# Altium PCB Balun_And_Demodulation.PcbDoc
Units mm, origin at the board's own origin, x right, y up, seen from the top; angles counter-clockwise.
Board outline 132 x 100 mm, 4 copper layers (Top Layer, GND, VCC, Bottom Layer), stack 1.593 mm thick; 59 components, 40 nets, 289 pads, 241 vias.
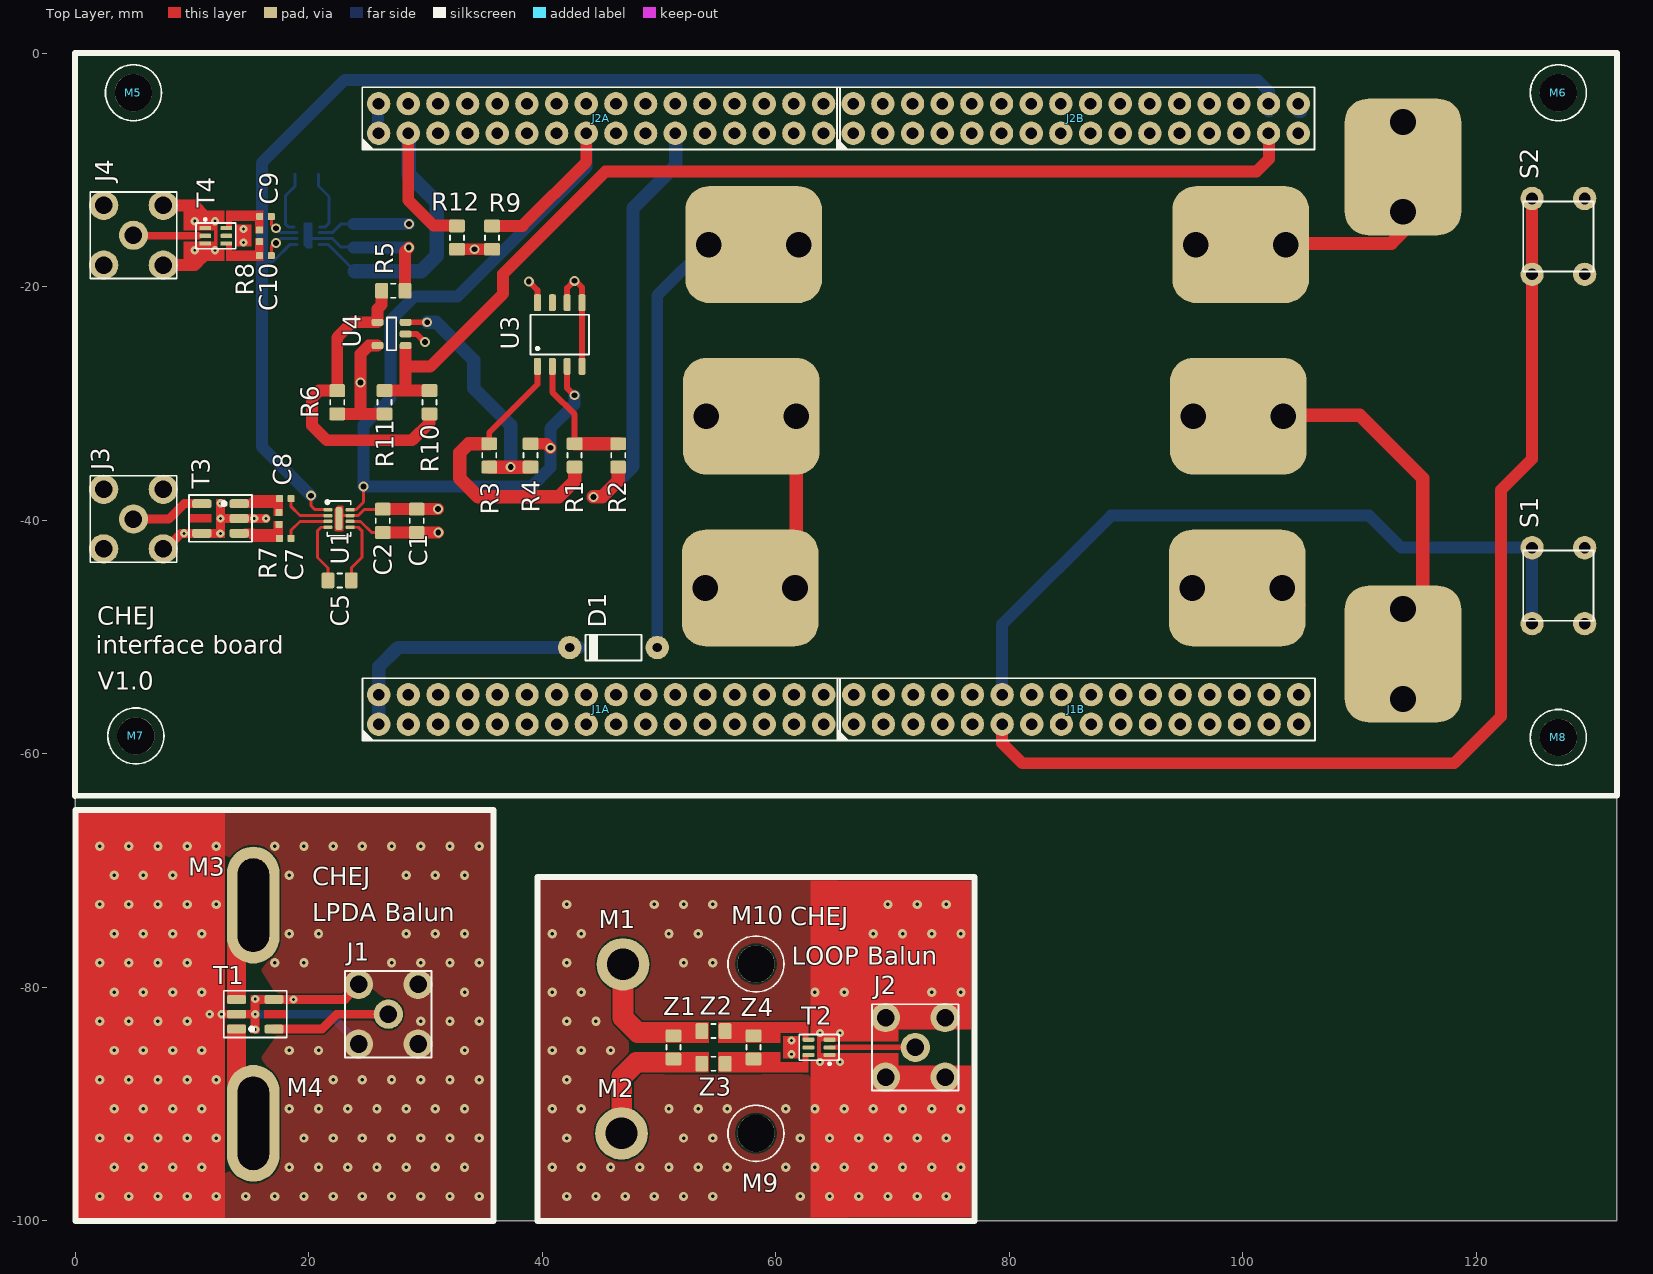
[diagram p0: Top Layer view]
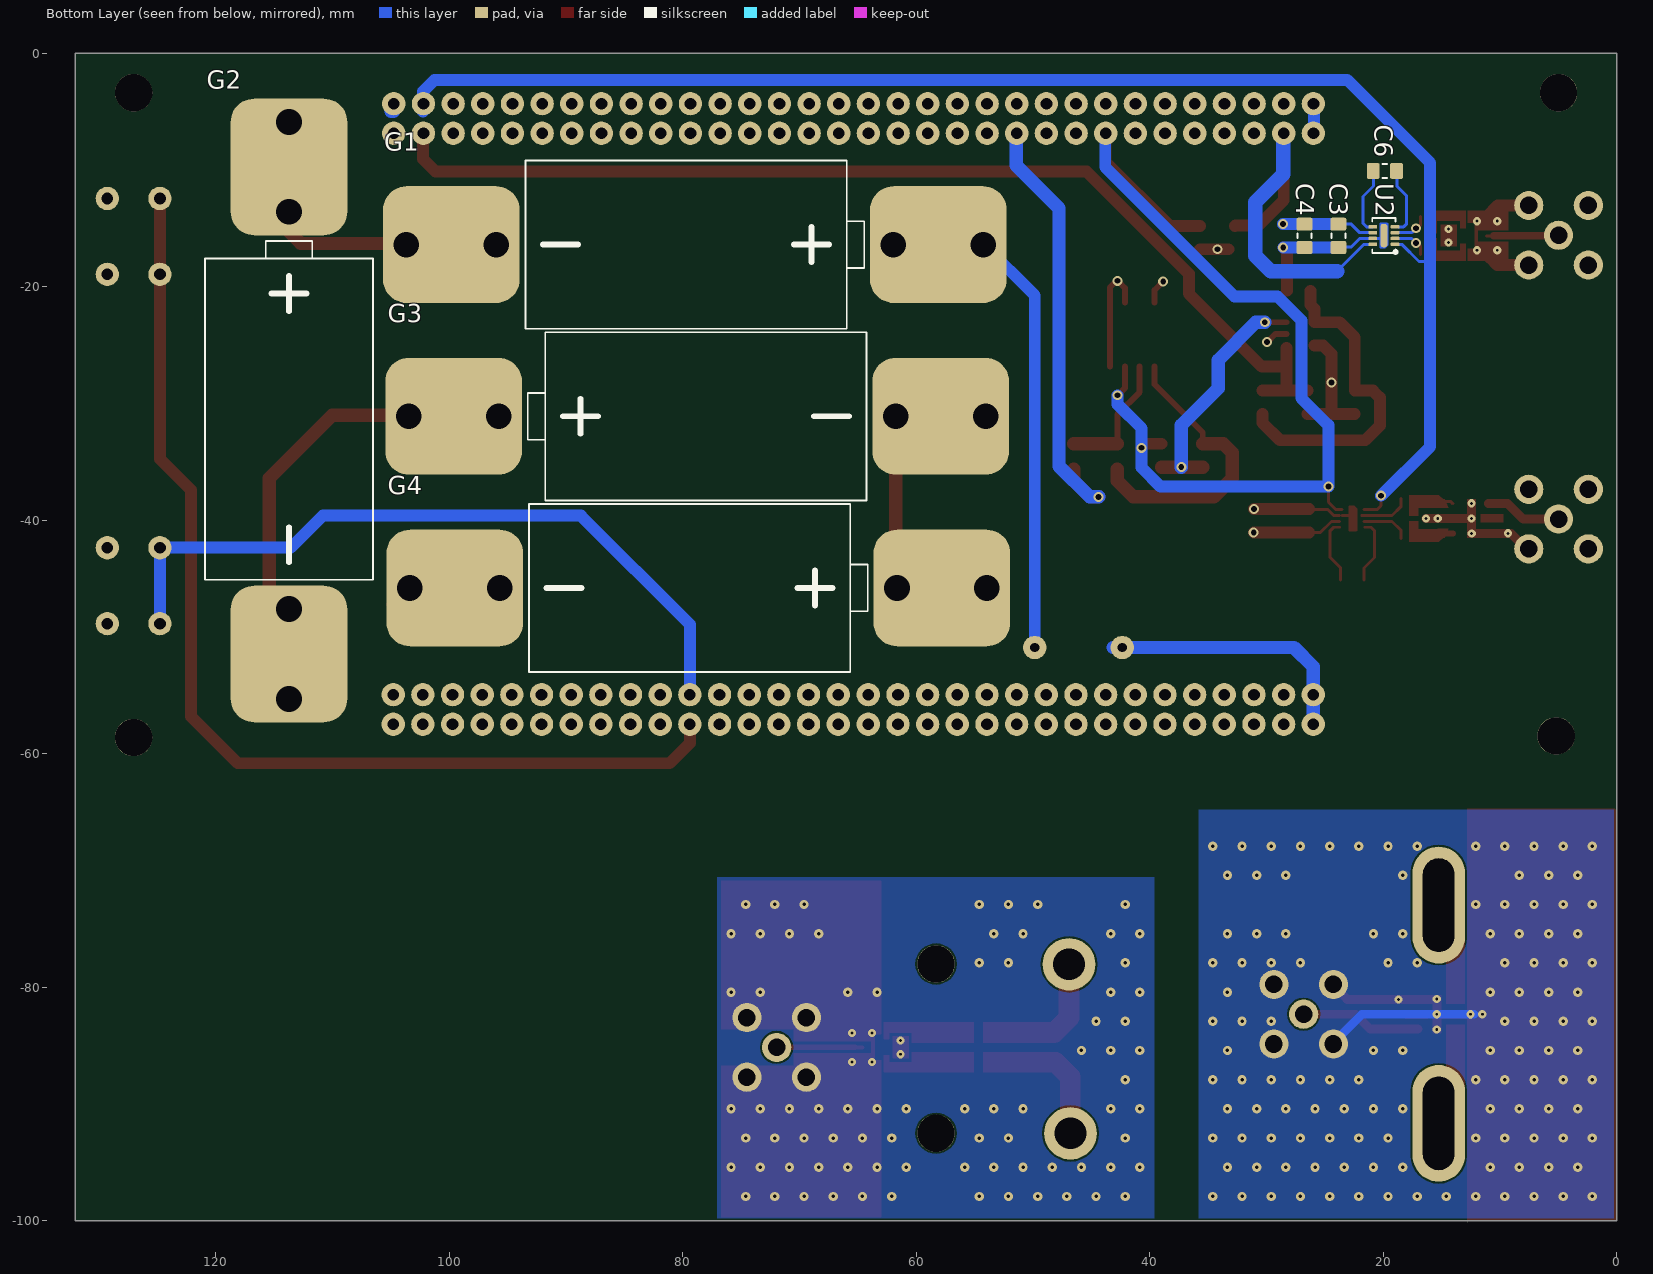
[diagram p1: Bottom Layer view, seen from below]
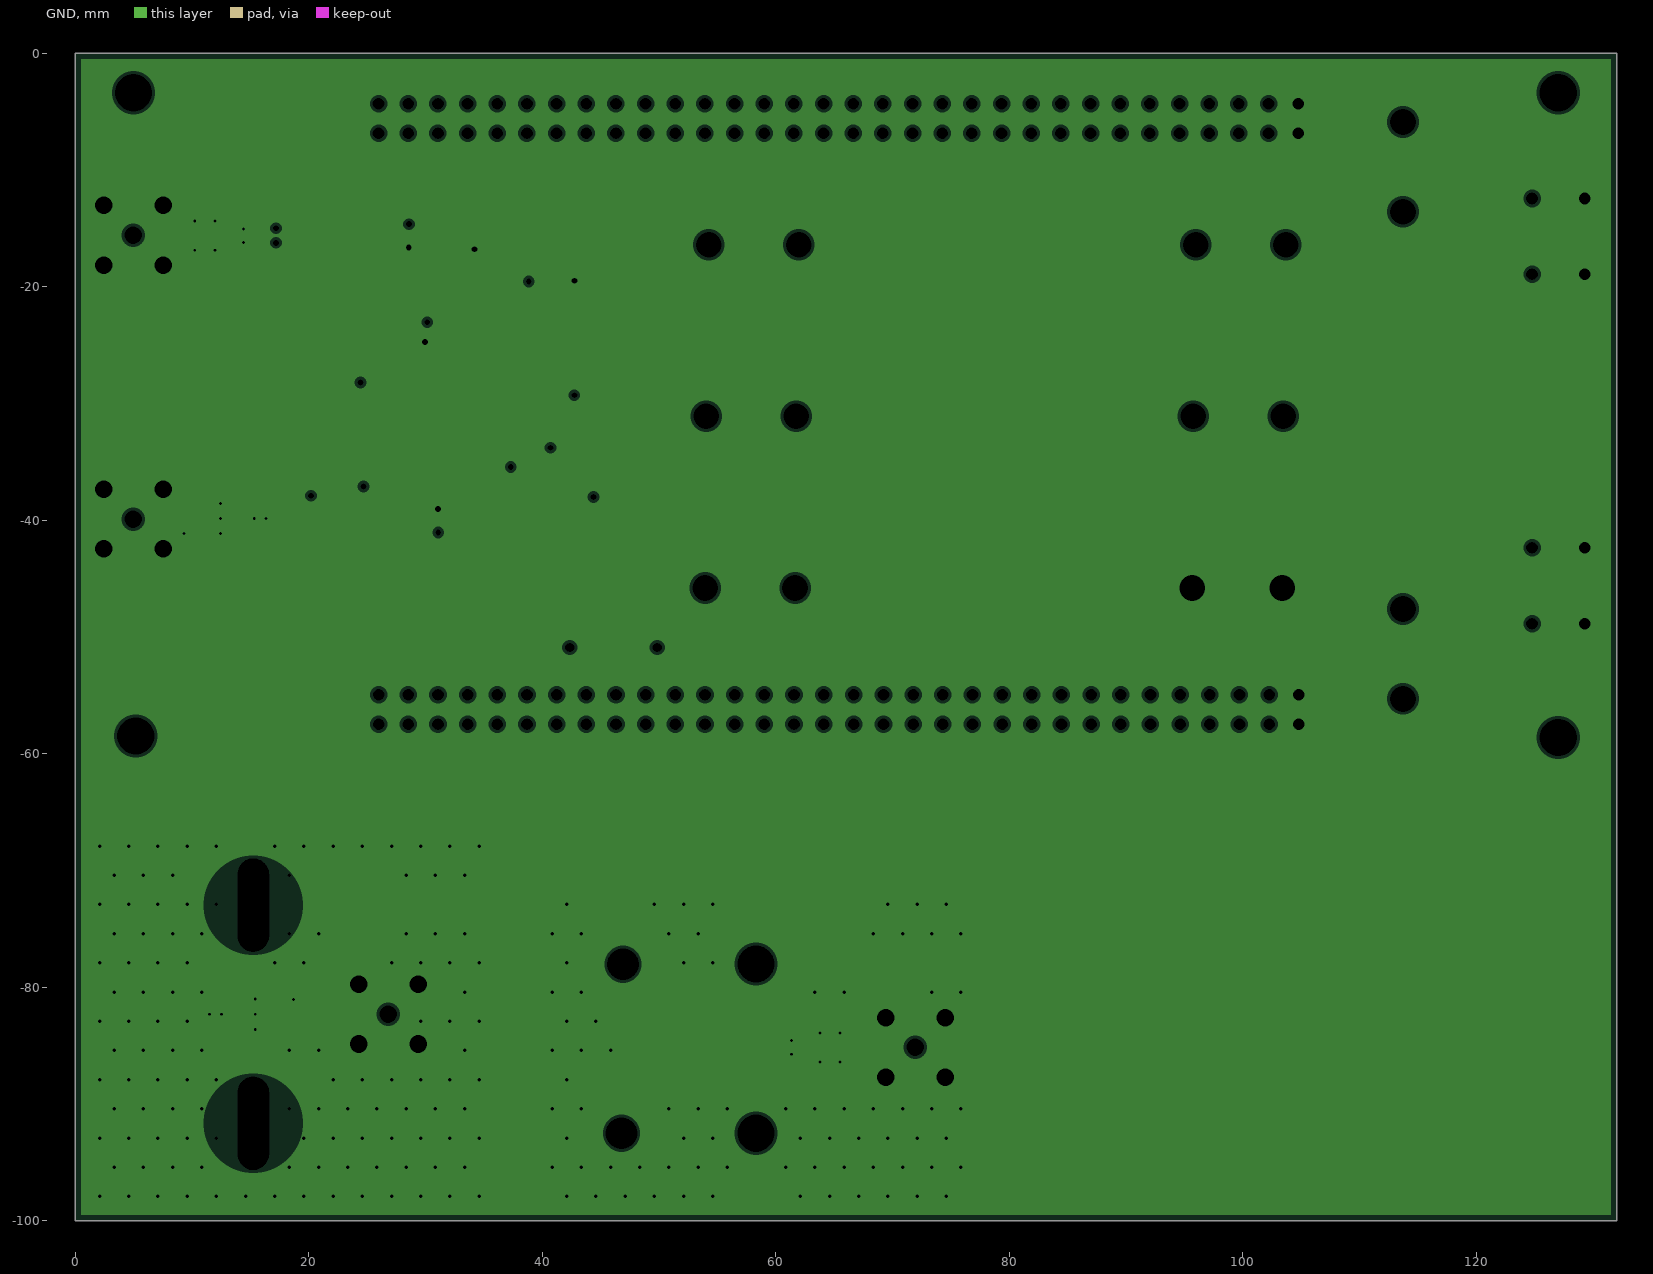
[diagram p2: GND, clearances drawn from the general rule]
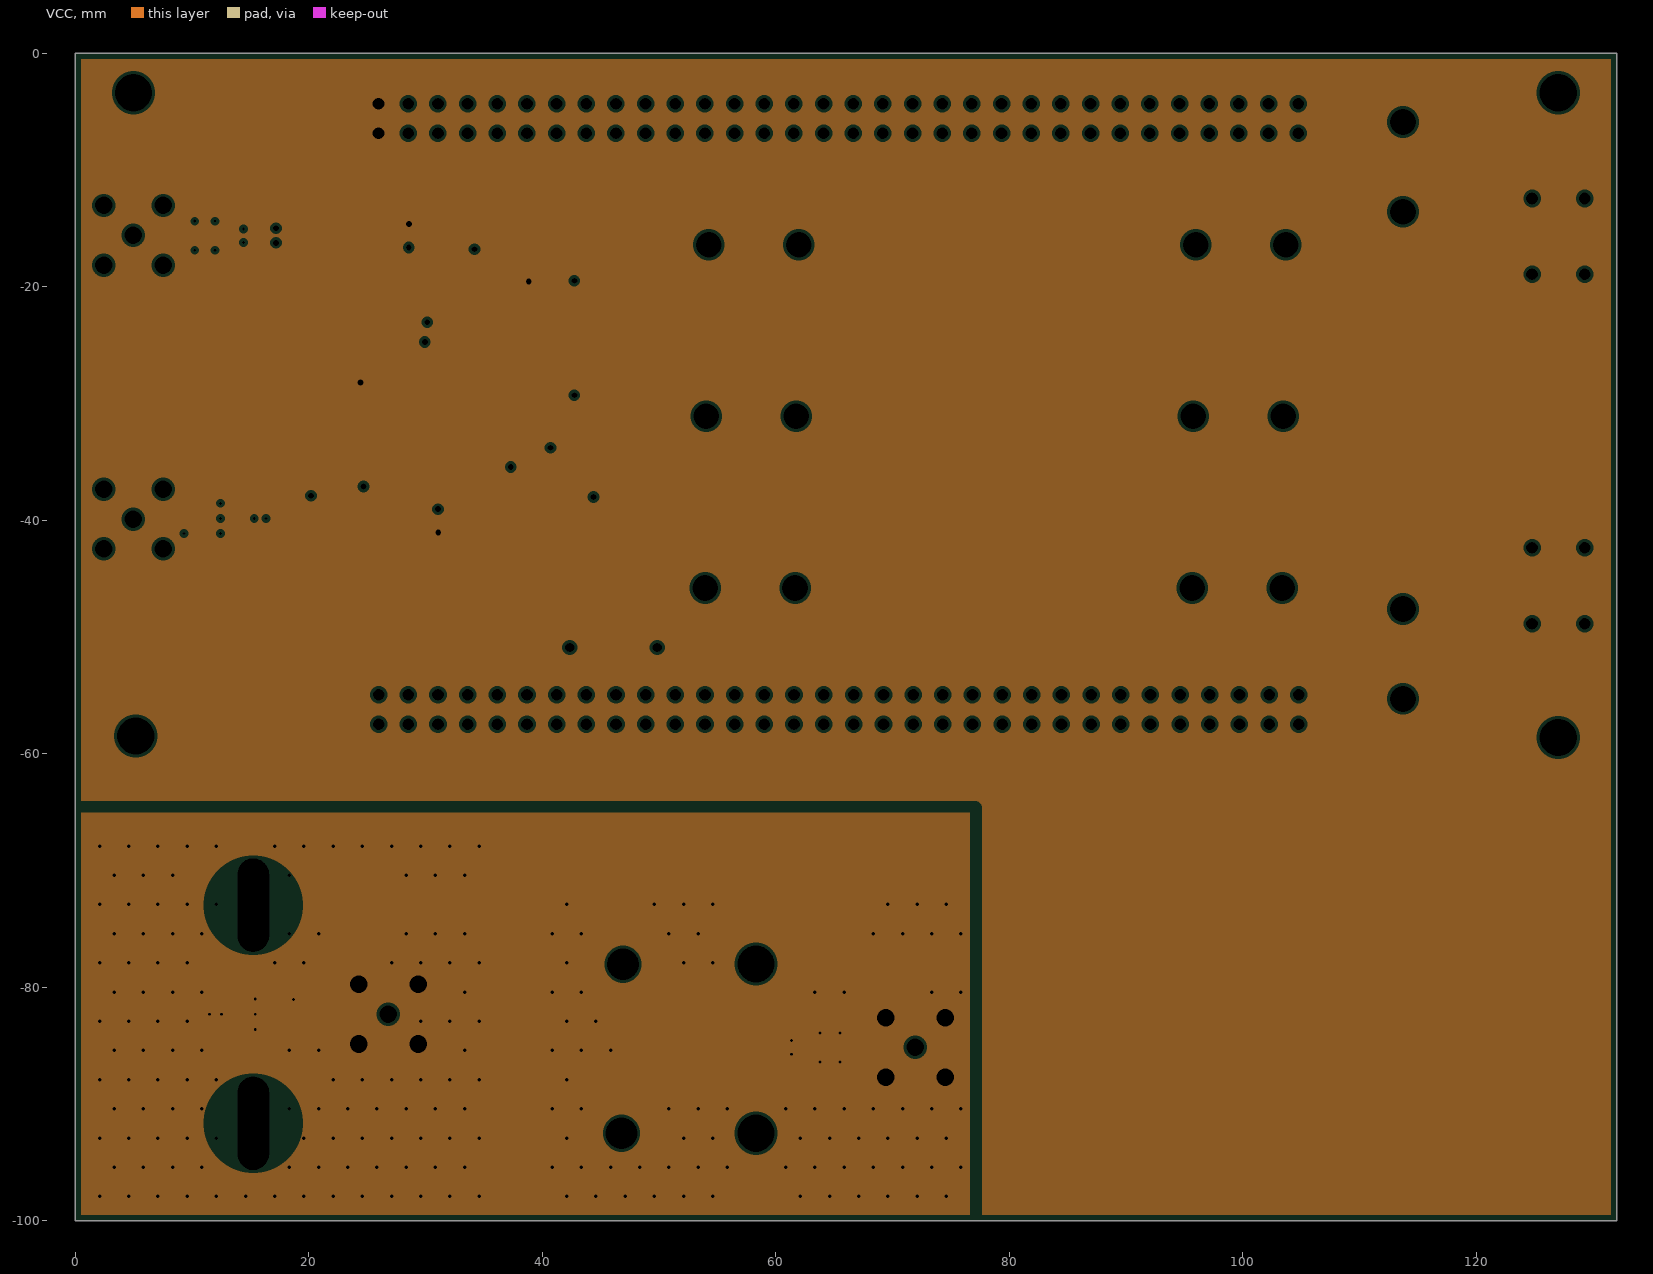
[diagram p3: VCC, clearances drawn from the general rule]

## Layer stack, top to bottom
Top Solder: solder mask 0.0102, Solder Resist, Dk 3.5
Top Layer: signal copper 0.0356
Dielectric 1: core 0.36, FR-4, Dk 4.2
GND: plane copper 0.036, net GND
Dielectric 5: prepreg 0.73, Dk 4.2
VCC: plane copper 0.036, net (Multiple Nets)
Dielectric 3: core 0.36, Dk 4.2
Bottom Layer: signal copper 0.0356
Bottom Solder: solder mask 0.0102, Solder Resist, Dk 3.5

## Board outline
0,-100 132,-100 132,0 0,0

## Design rules (kind name [scope] priority, off if disabled: settings)
BoardOutlineClearance [All] p1: gap=0.25 ignorepadtopadclearanceinfootprint=FALSE except(0: Arc-SplitContinuation Track-SplitContinuation SMDPad-SplitContinuation THPad-SplitContinuation Via-SplitContinuation Fill-SplitContinuation Poly-SplitContinuation Region-SplitContinuation Text-SplitContinuation)
Clearance Clearance-xPP-xTP-xTT [All] p1: gap=0.15 ignorepadtopadclearanceinfootprint=FALSE except(0: Arc-Hole Track-Hole SMDPad-Hole THPad-Hole Via-Hole Fill-Hole Poly-Hole Region-Hole Text-Hole)
ComponentClearance [All] p1: gap=0.25 collisioncheckmode=3 verticalgap=0.25 showdistances=FALSE
DiffPairsRouting [All] p1: maxlimit=0.25 minlimit=0.25 mostfreqgap=0.25 toplayer_minwidth=0.381 toplayer_maxwidth=0.381 toplayer_prefwidth=0.381 bottomlayer_minwidth=0.381 bottomlayer_maxwidth=0.381 bottomlayer_prefwidth=0.381 maxuncoupledlength=12.5
Height [All] p1: minheight=0 maxheight=25 prefheight=12.5
HoleSize HoleSize-PTH [All] p1: absolutevalues=TRUE maxlimit=2 minlimit=0.25 maxpercent=80.000 minpercent=20.000
HoleToHoleClearance [All] p1: gap=0.35 allowstackedmicrovias=TRUE
MinimumAnnularRing "Minimum IAR  >0.45mm" [((ObjectKind = 'Pad') OR (ObjectKind = 'Via')) And (Layer = 'MultiLayer') And (HoleDiameter > AsMM(0.45))] p1: minimumring=0.175 // minimum inner annular ring for pads > 0.45mm finished hole size
MinimumAnnularRing "Minimum IAR <=0.45mm" [((ObjectKind = 'Pad') OR (ObjectKind = 'Via')) And (Layer = 'MultiLayer') And (HoleDiameter <= AsMM(0.45))] p2: minimumring=0.175 // minimum inner annular ring for pads <= 0.45mm finished hole size
MinimumSolderMaskSliver [All] p1: minsoldermaskwidth=0.08
PlaneClearance PlaneClearance-IPI [All] p1: clearance=0.254
PlaneConnect [All] p1: planeconnectstyle=Direct reliefexpansion=0.175 reliefentries=4 reliefconductorwidth=0.2 reliefairgap=0.2
PolygonConnect PolygonConnect-xTW [All] p1: connectstyle=Direct reliefconductorwidth=0.2 reliefentries=4 polygonreliefangle="90 Angle" airgapwidth=0.2
RoutingCorners [All] p1: cornerstyle=45-Degree minsetback=2.5 maxsetback=2.5
RoutingVias "RoutingVias > 0.45mm" [(ObjectKind = 'Via') And (HoleDiameter > AsMM(0.45))] p1: holewidth=0.5 width=0.85 viastyle="Through Hole" minholewidth=0.5 minwidth=0.85 maxholewidth=0.9 maxwidth=1.25 // finishet hole size > 0.45mm
RoutingVias "RoutingVias <= 0.45mm" [(ObjectKind = 'Via') And (HoleDiameter <= AsMM(0.45))] p2: holewidth=0.3 width=0.65 viastyle="Through Hole" minholewidth=0.25 minwidth=0.6 maxholewidth=0.45 maxwidth=0.8 // finishet hole size <= 0.45mm
SilkToSilkClearance [All] p1: silktosilkclearance=0.2
SilkToSolderMaskClearance SilkscreenOverComponentPads [IsPad] p1: minsilkscreentomaskgap=0.2 clearancetoexposedcopper=TRUE
SolderMaskExpansion [All] p1: expansion=0
UnRoutedNet [All] p1: checkbadconnections=TRUE
Width Width-xTW [All] p1 off: maxlimit=1.5 minlimit=0.15 preferedwidth=0.2
18 further rules are at their usual default settings.

## Components (designator, comment, footprint, x,y, rotation, side; value= is the part's Value field where it differs from the comment)
C1 "1nF" "CAPACITOR 2012 REFLOW" 29.25,-40.05 r270 top
C2 "100nF" "CAPACITOR 2012 REFLOW" 26.35,-40.05 r270 top
C3 "100nF" "CAPACITOR 2012 REFLOW" 23.85,-15.65 r90 bottom
C4 "1nF" "CAPACITOR 2012 REFLOW" 26.75,-15.65 r90 bottom
C5 "*" "CAPACITOR 2012 REFLOW" 22.65,-45.15 r180 top
C6 "*" "CAPACITOR 2012 REFLOW" 19.87,-10.092 r180 bottom
C7 "100p" "CAPACITOR 1005 REFLOW" 17.999,-41.55 r180 top
C8 "100p" "CAPACITOR 1005 REFLOW" 18,-38.15 r180 top
C9 "100p" "CAPACITOR 1005 REFLOW" 16.299,-14 r180 top
C10 "100p" "CAPACITOR 1005 REFLOW" 16.299,-17.35 r180 top
D1 "*" "DIODE DO35 P7.5" 46.1,-50.9 r0 top
G1 "1.5V" "1.5V Cell AA/LR6" 78.95,-16.4 r0 bottom
G2 "1.5V" "1.5V Cell AA/LR6" 113.7,-30.6 r270 bottom
G3 "1.5V" "1.5V Cell AA/LR6" 78.75,-31.1 r180 bottom
G4 "1.5V" "1.5V Cell AA/LR6" 78.65,-45.8 r0 bottom
J1 "CONSMA001-G" "SMA TH Vertical Linx CONSMA001-G" 26.823,-82.296 r0 top
J1A "*" "PinHeader2x16 P2.54" 45.05,-56.2 r0 top
J1B "*" "PinHeader2x16 P2.54" 85.725,-56.2 r0 top
J2 "CONSMA001-G" "SMA TH Vertical Linx CONSMA001-G" 71.943,-85.137 r0 top
J2A "*" "PinHeader2x16 P2.54" 45.038,-5.6 r0 top
J2B "*" "PinHeader2x16 P2.54" 85.678,-5.6 r0 top
J3 "CONSMA001-G" "SMA TH Vertical Linx CONSMA001-G" 5,-39.9 r0 top
J4 "CONSMA001-G" "SMA TH Vertical Linx CONSMA001-G" 5,-15.6 r0 top
M1 "=Value" "Screw Hex Socket M2.5X4 Connected"#1 46.915,-78.025 r0 top
M2 "=Value" "Screw Hex Socket M2.5X4 Connected"#1 46.788,-92.503 r0 top
M3 "=Value" "Screw Hex Socket M2.5X4 Connected"#2 15.261,-72.952 r0 top
M4 "=Value" "Screw Hex Socket M2.5X4 Connected"#2 15.261,-91.638 r0 top
M5 "*" "Screw M3X12 Unconnected" 5,-3.4 r0 top
M6 "*" "Screw M3X12 Unconnected" 127,-3.4 r0 top
M7 "*" "Screw M3X12 Unconnected" 5.207,-58.471 r0 top
M8 "*" "Screw M3X12 Unconnected" 127,-58.6 r0 top
M9 "*" "Screw M3X12 Unconnected" 58.3,-92.496 r0 top
M10 "*" "Screw M3X12 Unconnected" 58.3,-77.996 r0 top
R1 "*" "RESISTOR 2012 REFLOW" 42.77,-34.45 r90 top
R2 "*" "RESISTOR 2012 REFLOW" 46.5,-34.45 r270 top
R3 "0" "RESISTOR 2012 REFLOW" 35.465,-34.45 r90 top
R4 "z" "RESISTOR 2012 REFLOW" 39,-34.45 r90 top
R5 "*" "RESISTOR 2012 REFLOW" 27.25,-20.35 r0 top
R6 "*" "RESISTOR 2012 REFLOW" 22.45,-29.9 r90 top
R7 "50" "RESISTOR 1005 REFLOW" 17.45,-39.85 r270 top
R8 "100" "RESISTOR 1005 REFLOW" 15.8,-15.65 r90 top
R9 "0" "RESISTOR 2012 REFLOW" 35.7,-15.8 r90 top
R10 "*" "RESISTOR 2012 REFLOW" 30.35,-29.9 r90 top
R11 "*" "RESISTOR 2012 REFLOW" 26.5,-29.9 r270 top
R12 "0" "RESISTOR 2012 REFLOW" 32.7,-15.8 r90 top
S1 "*" "Push Button C6.0x6.0 WE 430186130716" 127,-45.6 r90 top
S2 "*" "Push Button C6.0x6.0 WE 430186130716" 127,-15.7 r90 top
T1 "{Value}" TC1-1TG2+ 15.427,-82.296 r90 top
T2 "{Value}" NCS2-771-75+ 63.7,-85.137 r90 top
T3 "{Value}" TC1-1TG2+ 12.45,-39.85 r270 top
T4 "{Value}" NCS2-771-75+ 12.05,-15.65 r270 top
U1 "LT5537" "DFN8 P0.5 T0.6X1.2 C2.0X3.0 H0.8" 22.6,-39.85 r0 top
U2 "LT5537" "DFN8 P0.5 T0.6X1.2 C2.0X3.0 H0.8" 19.95,-15.627 r0 bottom
U3 "*" "SO8 P1.27 C4.0X5.0 H1.75" 41.5,-24.1 r90 top
U4 "LMV7239QDVB" "SOT23-5 P0.95 C1.6x3.0 H1.3" 27.1,-24.05 r180 top
Z1 "*" "RESISTOR 2012 REFLOW" 51.233,-85.137 r90 top
Z2 "*" "RESISTOR 2012 REFLOW" 54.662,-83.74 r0 top
Z3 "*" "RESISTOR 2012 REFLOW" 54.662,-86.534 r0 top
Z4 "*" "RESISTOR 2012 REFLOW" 58.091,-85.137 r90 top

## Footprints (in the part's own frame and the unit in brackets; to place one, negate y for a bottom-side part, rotate by r counter-clockwise, add the part's x,y. Pads: shape width x height; smd on the part's side, far side on the other; paste and mask are expansions set on the pad)
"1.5V Cell AA/LR6" [mm] "Battery Cell D14.5 L50.5"
  rrect50% 8x10 hole 2.2 copper offset 2,0: 1(-24.7,0) 2(17,0)
  rrect50% 8x10 hole 2.2 copper offset -2,0: 1(-17,0) 2(24.7,0)
  silkscreen extent -14.5,-7.2 14.5,7.2, body extent -26.7,-7.2 26.8,7.2, height 15
"CAPACITOR 1005 REFLOW" [mm] "Capacitor SMD 1.0x0.5mm (0402-imperial)"
  rrect25% 0.6x0.6 smd: 1(-0.5,0) 2(0.499,0)
  body extent -0.5,-0.25 0.5,0.25, height 0.5
"CAPACITOR 2012 REFLOW" [mm] "Capacitor SMD 2.0x1.2mm (0805-imperial)"
  rrect25% 1.1x1.35 smd: 1(-1,0) 2(1,0)
  silkscreen extent -0.2,-0.6 0.2,0.6, body extent -1,-0.6 1,0.6, height 1
"DFN8 P0.5 T0.6X1.2 C2.0X3.0 H0.8" [mm] "DFN 8-Leads, Body 2.00x3.00mm, Pitch 0.5mm"
  rrect50% 0.75x0.3 smd: 1(-0.95,0.75) 2(-0.95,0.25) 3(-0.95,-0.25) 4(-0.95,-0.75) 5(0.95,-0.75) 6(0.95,-0.25) 7(0.95,0.25) 8(0.95,0.75)
  rrect75% 0.6x2 smd: 9(0,0)
  Top Layer region: 0.35,-1.05 0.35,1.05 0.3,1.1 -0.1,1.1 -0.35,0.85 -0.35,-1.05 -0.3,-1.1 0.3,-1.1
  silkscreen extent -1.1,-1.5 1,1.5, body extent -1,-1.5 1,1.5, height 0.81
"DIODE DO35 P7.5" [mm] "Diode DO35 pitch 7.5mm, Diameter 1.8mm, Case 4.3mm"
  round 2 hole 0.8: 1(-3.75,0) 2(3.75,0)
  silkscreen extent -2.4,-1.1 2.4,1.1, body extent -4.05,-0.91 4.05,0.91, height 1.82
NCS2-771-75+ [mm] "Mini-Circuits RF Transformer"
  rrect50% 0.36x1 smd: 1(-0.66,-0.9) 2(0,-0.9) 3(0.66,-0.9) 4(0.66,0.9) 5(0,0.9) 6(-0.66,0.9)
  silkscreen extent -1.5,-1.7 1.1,1.7, body extent -1,-0.6 1,0.6, height 0.94
"PinHeader2x16 P2.54" [mm] "Plug connector"
  round 2 hole 1: 1(-19.05,-1.27) 2(-19.05,1.27) 3(-16.51,-1.27) 4(-16.51,1.27) 5(-13.97,-1.27) 6(-13.97,1.27) 7(-11.43,-1.27) 8(-11.43,1.27) 9(-8.89,-1.27) 10(-8.89,1.27) 11(-6.35,-1.27) 12(-6.35,1.27) 13(-3.81,-1.27) 14(-3.81,1.27) 15(-1.27,-1.27) 16(-1.27,1.27) 17(1.27,-1.27) 18(1.27,1.27) 19(3.81,-1.27) 20(3.81,1.27) 21(6.35,-1.27) 22(6.35,1.27) 23(8.89,-1.27) 24(8.89,1.27) 25(11.43,-1.27) 26(11.43,1.27) 27(13.97,-1.27) 28(13.97,1.27) 29(16.51,-1.27) 30(16.51,1.27) 31(19.05,-1.27) 32(19.05,1.27)
  silkscreen extent -20.45,-2.67 20.45,2.67, body extent -20.32,-2.54 20.32,2.54, height 8.5
"Push Button C6.0x6.0 WE 430186130716" [mm] "Push Button Wurth Elektronik 430186130716"
  round 2 hole 1: 1(-3.25,2.25) 2(-3.25,-2.25) 3(3.25,2.25) 4(3.25,-2.25)
  silkscreen extent -3,-3 3,3, body extent -3.4,-3.1 3.4,3.1, height 15
"RESISTOR 1005 REFLOW" [mm] "Resistor SMD 1.0x0.5mm (0402-imperial)"
  rrect25% 0.6x0.6 smd: 1(-0.5,0) 2(0.5,0)
  body extent -0.5,-0.25 0.5,0.5, height 25
"RESISTOR 2012 REFLOW" [mm] "Resistor SMD 2.0x1.2mm (0805-imperial)"
  rrect25% 1.1x1.35 smd: 1(-1,0) 2(1,0)
  silkscreen extent -0.2,-0.6 0.2,0.6, body extent -1,-0.62 1,0.63, height 0.45
"Screw Hex Socket M2.5X4 Connected"#1 [mm] "Screw Hex Socket M2.5X4 Connected BN610"
  round 4.5 hole 2.7 paste-5 mask+0: 1(0,0)
  body extent -2.25,-2.25 2.25,2.25, height 2.5
"Screw Hex Socket M2.5X4 Connected"#2 [mm] "Screw Hex Socket M2.5X4 Connected BN610"
  oval 4.5x10 hole 2.7 slot 8 at 90 deg paste-5 mask+0: 1(0,0)
  body extent -2.25,-2.25 2.25,2.25, height 2.5
"Screw M3X12 Unconnected" [mm] "Standard Screw M3X12 Unconnected BN330"
  round 3.2 hole 3.2 unplated paste+0 mask+0: 0(0,0)
  silkscreen extent -2.4,-2.4 2.4,2.4, body extent -2.29,-2.3 2.29,2.3, height 2
"SMA TH Vertical Linx CONSMA001-G" [mm] "Connector SMA Trough Hole Vertical Linx nr. CONSMA001-G"
  round 2.5 hole 1.5: 1(0,0) 2(-2.55,-2.55) 2(-2.55,2.55) 2(2.55,-2.55) 2(2.55,2.55)
  silkscreen extent -3.7,-3.7 3.7,3.7, body extent -3.5,-3.5 3.5,3.5, height 10.25
"SO8 P1.27 C4.0X5.0 H1.75" [mm] "8-Pin Small Outline Integrated Circuit 1.27 mm Pitch, IPC Medium Density"
  rrect50% 1.45x0.6 smd: 1(-2.725,1.905) 2(-2.725,0.635) 3(-2.725,-0.635) 4(-2.725,-1.905) 5(2.725,-1.905) 6(2.725,-0.635) 7(2.725,0.635) 8(2.725,1.905)
  silkscreen extent -1.7,-2.5 1.7,2.5, body extent -2,-2.5 2,2.5, height 1.76
"SOT23-5 P0.95 C1.6x3.0 H1.3" [mm] "SOT23, 5-Leads, Body 1.6x3.0mm, Pitch 0.95mm, IPC Medium Density"
  rrect50% 1x0.6 smd: 1(-1.2,1) 2(-1.2,0) 3(-1.2,-1) 4(1.2,-1) 5(1.2,1)
  silkscreen extent -0.4,-1.4 0.4,1.4, body extent -0.8,-1.5 0.8,1.5, height 1.3
TC1-1TG2+ [mm] "Mini-Circuits RF Transformer"
  rrect50% 0.76x1.65 smd: 1(-1.27,1.6) 2(0,1.6) 3(1.27,1.6) 4(1.27,-1.6) 6(-1.27,-1.6)
  silkscreen extent -2,-2.7 2,2.7, body extent -1.9,-1.9 1.9,1.9, height 3.81

## Part data
C1 C2 C3 C4 C5 C6 C7 C8 C9 C10: library part Capacitor, "Capacitor"
D1: library part DIODE, "Diode generic 2 leads"
G1 G2 G3 G4: library part Battery, "Battery Generic"
J1 J2 J3 J4: library part "SMA TH VERTICAL LINX CONSMA001-G", "SMA TH VERTICAL LINX CONSMA001-G"
J1A J1B J2A J2B: library part PinHeader2x16, "Plug connector"
M1 M2 M3 M4: library part "Screw Hex Socket Connected", "Screw Hex Socket Connected BN610"
M5 M6 M7 M8 M9 M10: library part "Screw Unconnected", "Screw Unconnected BN330"
R1 R2 R3 R4 R5 R6 R7 R8 R9 R10 R11 R12 Z1 Z2 Z3 Z4: library part Resistor, "Resistor"
S1 S2: library part "Push Button 4Pins", "Push Button, 4 pins, 2 poles parrallèle"
T1 T3: library part TC1-1TG2+, "Mini-Circuits RF Transformer"
T2 T4: library part NCS2-771-75+, "Mini-Circuits RF Transformer"
U1 U2: "Wide Dynamic Range RF/IF Log Detector"
U3: library part "OPA DUAL", "Generic dual OPA 8 pins"
U4: library part "COMPARATOR SINGLE SOT23-5", "Generic Single Comparator 5pins 1OUT/2-V/3+IN/4-IN/5+V"

## Via types
v1: diameter 0.8, hole 0.3, Top Layer to Bottom Layer, 199 vias
v2: diameter 0.7, hole 0.25, Top Layer to Bottom Layer, 24 vias
v3: diameter 0.85, hole 0.5, Top Layer to Bottom Layer, 18 vias

## Nets (pads, with @x,y where several pads share a name; then routed paths per layer and width w, separated by ;. In a path a pad name is that pad's centre, name@x,y a point inside that pad or via, vN(x,y) a via of type N, cw(c..) or ccw(c..) an arc to the next point about the centre after c; other vN are vias at no path point)
+3: C1.2 C2.2 C3.2 C4.2 J2A.1 J2A.2 R6.1 R11.2 U1.6 U2.6 U3.8 U4.5 | length 31.4
  Top Layer w0.254: U1.6@23.75,-40.1 24.45,-40.1 25.4,-41.05 C2.2
  Top Layer w0.508: v3(38.85,-19.55) 39.595,-20.295 U3.8
  Top Layer w1.016: R6.1 24.45,-30.9 ; U4.5 25.15,-25.05 24.45,-25.75 v3(24.45,-28.2) 24.45,-30.9 ; C2.2 C1.2 v3(31.1,-41.05) ; R11.2 24.45,-30.9
  Bottom Layer w0.254: U2.6 22.023,-15.377 22.75,-14.65 C3.2
  Bottom Layer w1.016: C3.2 26.75,-14.65 v3(28.6,-14.65) ; J2A.1@25.935,-6.844 J2A.2@25.935,-4.304
+5: D1.1 J1A.1 J1A.2 | length 22.4
  Bottom Layer w1.143: J1A.1@26,-57.074 26,-54.534 26,-52.55 27.65,-50.9 D1.1@43.15,-50.9
GND: C1.1 C2.1 C3.1 C4.1 G4.2 J1.2 J1B.31 J1B.32 J2.2 J2B.31 J2B.32 J3.2 J4.2 R5.2 R9.1 R12.1 S1.2 S1.4 S2.2 S2.4 T1.2 T1.4 T2.1 T2.3 T3.2 T3.4 T4.1 T4.3 U1.7 U1.9 U2.7 U2.9 U3.4 U3.5 U3.6 U4.2 | length 84.1
  Top Layer w0.254: U1.9 22.85,-39.6 U1.7 ; U1.7@23.75,-39.6 24.25,-39.6 24.75,-39.1 26.3,-39.1 C2.1
  Top Layer w0.508: U4.2 29.25,-24.05 v3(29.95,-24.75) ; R12.1@33.2,-16.756 R12.1@33.244,-16.8 ; U3.6 42.135,-20.115 v3(42.75,-19.5) ; v3@42.75,-19.65 43,-19.65 43.405,-20.055 U3.5 U3.4
  Top Layer w0.762: J3.2@7.757,-42.45 9.086,-41.121 v2(9.337,-41.121) v2(9.337,-41.121) T3.4 12.445,-41.12 12.445,-39.86 14.045,-39.85 T3.2 v2(15.345,-39.85) v2(16.345,-39.85) ; v2(11.527,-82.296) v2(12.527,-82.296) T1.2 15.417,-82.296 15.427,-82.286 15.427,-81.016 15.437,-81.026 T1.4 v2(18.697,-81.026) 23.097,-81.026 J1.2@24.377,-79.746
  Top Layer w1.016: J4.2@7.75,-18.15 10.25,-18.15 10.9,-17.5 ; J4.2@7.75,-13.05 10.2,-13.05 11.15,-14 ; C2.1 C1.1 v3(31.08,-39.05) ; R5.2 28.25,-16.975 v3(28.575,-16.65) ; R12.1@33.244,-16.8 v3(34.2,-16.8) R9.1
  Top Layer w1.143: G4.2@102.825,-46.325 103.35,-45.8 G4.2@104.775,-47.225
  Bottom Layer w0.254: U2.9 20.2,-15.877 U2.7 ; U2.7@20.9,-15.873 22.023,-15.873 22.75,-16.6 C3.1@23.85,-16.6
  Bottom Layer w0.762: v2@12.227,-82.296 v2(12.527,-82.296) v2(15.427,-82.296) 21.827,-82.296 J1.2@24.377,-84.846
  Bottom Layer w1.016: C3.1 C4.1@26.75,-16.65 ; C4.1@26.8,-16.7 C4.1 ; v3(28.575,-16.65) C4.1
  Bottom Layer w1.143: J2B.32@104.775,-5.004 J2B.32@104.935,-5.004
  other v1: 2.1,-97.9 4.6,-97.9 7.1,-97.9 9.6,-97.9 12.1,-97.9 14.6,-97.9 17.1,-97.9 19.6,-97.9 22.1,-97.9 24.6,-97.9 27.1,-97.9 29.6,-97.9 32.1,-97.9 34.6,-97.9 42.1,-97.9 44.6,-97.9 47.1,-97.9 49.6,-97.9 52.1,-97.9 54.6,-97.9 62.1,-97.9 64.6,-97.9 67.1,-97.9 69.6,-97.9 72.1,-97.9 74.6,-97.9 3.35,-95.4 5.85,-95.4 8.35,-95.4 10.85,-95.4 18.35,-95.4 20.85,-95.4 23.35,-95.4 25.85,-95.4 28.35,-95.4 30.85,-95.4 33.35,-95.4 40.85,-95.4 43.35,-95.4 45.85,-95.4 48.35,-95.4 50.85,-95.4 53.35,-95.4 55.85,-95.4 60.85,-95.4 63.35,-95.4 65.85,-95.4 68.35,-95.4 70.85,-95.4 73.35,-95.4 75.85,-95.4 2.1,-92.9 4.6,-92.9 7.1,-92.9 9.6,-92.9 12.1,-92.9 19.6,-92.9 22.1,-92.9 24.6,-92.9 27.1,-92.9 29.6,-92.9 32.1,-92.9 34.6,-92.9 42.1,-92.9 52.1,-92.9 54.6,-92.9 62.1,-92.9 64.6,-92.9 67.1,-92.9 69.6,-92.9 72.1,-92.9 74.6,-92.9 3.35,-90.4 5.85,-90.4 8.35,-90.4 10.85,-90.4 18.35,-90.4 20.85,-90.4 23.35,-90.4 25.85,-90.4 28.35,-90.4 30.85,-90.4 33.35,-90.4 40.85,-90.4 43.35,-90.4 50.85,-90.4 53.35,-90.4 55.85,-90.4 60.85,-90.4 63.35,-90.4 65.85,-90.4 68.35,-90.4 70.85,-90.4 73.35,-90.4 75.85,-90.4 2.1,-87.9 4.6,-87.9 7.1,-87.9 9.6,-87.9 12.1,-87.9 22.1,-87.9 24.6,-87.9 27.1,-87.9 29.6,-87.9 32.1,-87.9 34.6,-87.9 42.1,-87.9 3.35,-85.4 5.85,-85.4 8.35,-85.4 10.85,-85.4 18.35,-85.4 20.85,-85.4 33.35,-85.4 40.85,-85.4 43.35,-85.4 45.85,-85.4 2.1,-82.9 4.6,-82.9 7.1,-82.9 9.6,-82.9 29.6,-82.9 32.1,-82.9 34.6,-82.9 42.1,-82.9 44.6,-82.9 3.35,-80.4 5.85,-80.4 8.35,-80.4 10.85,-80.4 33.35,-80.4 40.85,-80.4 43.35,-80.4 63.35,-80.4 65.85,-80.4 73.35,-80.4 75.85,-80.4 2.1,-77.9 4.6,-77.9 7.1,-77.9 9.6,-77.9 17.1,-77.9 19.6,-77.9 27.1,-77.9 29.6,-77.9 32.1,-77.9 34.6,-77.9 42.1,-77.9 52.1,-77.9 54.6,-77.9 3.35,-75.4 5.85,-75.4 8.35,-75.4 10.85,-75.4 18.35,-75.4 20.85,-75.4 28.35,-75.4 30.85,-75.4 33.35,-75.4 40.85,-75.4 43.35,-75.4 50.85,-75.4 53.35,-75.4 68.35,-75.4 70.85,-75.4 73.35,-75.4 75.85,-75.4 2.1,-72.9 4.6,-72.9 7.1,-72.9 9.6,-72.9 12.1,-72.9 42.1,-72.9 49.6,-72.9 52.1,-72.9 54.6,-72.9 69.6,-72.9 72.1,-72.9 74.6,-72.9 3.35,-70.4 5.85,-70.4 8.35,-70.4 18.35,-70.4 28.35,-70.4 30.85,-70.4 33.35,-70.4 2.1,-67.9 4.6,-67.9 7.1,-67.9 9.6,-67.9 12.1,-67.9 17.1,-67.9 19.6,-67.9 22.1,-67.9 24.6,-67.9 27.1,-67.9 29.6,-67.9 32.1,-67.9 34.6,-67.9
  other v2: 63.773,-86.379 65.5,-86.38 61.338,-85.72 61.338,-84.552 63.776,-83.891 65.5,-83.891 15.427,-83.596 15.427,-80.996 12.438,-41.13 12.445,-39.85 12.445,-38.55 10.25,-16.885 11.977,-16.883 14.412,-16.224 14.412,-15.056 10.25,-14.396 11.974,-14.396
NetC5_1: C5.1 U1.5 | length 5.5
  Top Layer w0.254: C5.1@23.65,-45.1 23.65,-44.1 24.55,-43.2 24.55,-40.9 24.25,-40.6 U1.5@23.75,-40.6
NetC5_2: C5.2 U1.4 | length 5.5
  Top Layer w0.254: U1.4@21.56,-40.6 21.06,-40.6 20.76,-40.9 20.76,-43.2 21.65,-44.09 C5.2@21.65,-45.1
NetC6_1: C6.1 U2.5 | length 5.5
  Bottom Layer w0.254: C6.1@20.85,-10.377 20.85,-11.377 21.75,-12.277 21.75,-14.577 21.45,-14.877 U2.5@20.95,-14.877
NetC6_2: C6.2 U2.4 | length 5.5
  Bottom Layer w0.254: U2.4@18.76,-14.877 18.26,-14.877 18,-14.617 18,-12.237 18.85,-11.387 C6.2@18.85,-10.377
NetC7_1: C7.1 U1.3 | length 4.2
  Top Layer w0.254: C7.1 18.499,-40.851 19.25,-40.1 U1.3
NetC7_2: C7.2 R7.2 T3.3 | length 3.3
  Top Layer w0.508: T3.3 16.79,-41.12 16.96,-41.29
  Top Layer w1.1: 16.96,-41.29 C7.2@17.25,-41.29
NetC8_1: C8.1 U1.2 | length 4.4
  Top Layer w0.254: C8.1 18.5,-38.85 19.25,-39.6 U1.2@21.85,-39.6
NetC8_2: C8.2 R7.1 T3.1 | length 3.2
  Top Layer w0.254: T3.1 14.23,-38.4 16.91,-38.4
  Top Layer w1.1: 16.91,-38.4 17.2,-38.4
NetC9_1: C9.1 U2.3 | length 3.2
  Top Layer w0.254: C9.1 16.799,-14.699 17.1,-15 v3(17.2,-15)
  Bottom Layer w0.254: v3@17.2,-15.043 v3(17.2,-15) 17.577,-15.377 U2.3
NetC9_2: C9.2 R8.2 T4.6
NetC10_1: C10.1 U2.2 | length 3.1
  Top Layer w0.254: C10.1@16.799,-17.25 16.799,-16.551 v3@17.1,-16.25
  Bottom Layer w0.254: v3(17.2,-16.25) 17.577,-15.873 U2.2@19,-15.873
NetC10_2: C10.2 R8.1 T4.4
NetD1_2: D1.2 G1.1 | length 36.4
  Bottom Layer w1.016: D1.2 49.85,-20.75 54.2,-16.4 G1.1@54.25,-16.4
NetG1_2: G1.2 G2.1 | length 10.9
  Top Layer w1.143: G1.2@105.6,-16.3 112.7,-16.3 G2.1@115.4,-13.6
NetG2_2: G2.2 G3.1 | length 23.4
  Top Layer w1.143: G3.1@105.4,-31 110,-31 115.4,-36.4 G2.2@115.4,-47.6
NetG3_2: G3.2 G4.1 | length 14.7
  Top Layer w1.143: G4.1@61.65,-45.8 61.75,-45.7 G3.2@61.75,-31.1
NetJ1_1: J1.1 T1.6 | length 10.4
  Top Layer w0.762: T1.6 21.127,-83.566 22.397,-82.296 J1.1@26.927,-82.296
NetJ1B_11: J1B.11 S2.1 S2.3 | length 92.6
  Top Layer w1.016: J1B.11@79.375,-57.074 79.375,-59.075 81.108,-60.808 118.092,-60.808 122.1,-56.8 122.1,-37.4 124.75,-34.75 124.75,-19.1 S2.1@124.9,-18.95 ; S2.1 S2.3
NetJ1B_12: J1B.12 S1.1 S1.3 | length 62.4
  Bottom Layer w1.016: J1B.12@79.375,-54.534 79.375,-48.925 88.7,-39.6 110.8,-39.6 113.55,-42.35 S1.3@124.65,-42.35 ; S1.1 S1.3
NetJ2_1: J2.1 T2.2 | length 7.3
  Top Layer w0.36: T2.2 65.2,-85.137
  Top Layer w0.457: 65.2,-85.137 J2.1
NetJ2A_3: J2A.3 R12.2 U2.8 | length 33.2
  Top Layer w1.016: J2A.3 28.528,-12.604 30.68,-14.756 32.656,-14.756 R12.2
  Bottom Layer w0.254: U2.8 21.66,-16.377 23.965,-18.682
  Bottom Layer w1.27: 23.965,-18.682 29.635,-18.682 30.97,-17.347 30.97,-12.776 28.575,-10.381 J2A.3@28.575,-7.544
NetJ2A_15: J2A.15 R4.2 R9.2 U1.8 U3.3 | length 83.5
  Top Layer w0.254: U1.8 24.06,-39.1 24.706,-38.454 v3(24.706,-37.12)
  Top Layer w0.508: U3.3 42.135,-28.685 v3(42.75,-29.3)
  Top Layer w1.016: R9.2 38.3,-14.8 43.768,-9.332 J2A.15 ; R4.2 40.35,-33.45 v3(40.7,-33.8)
  Bottom Layer w1.016: v3(42.75,-29.3) 42.75,-30.09 40.7,-32.14 v3(40.7,-33.8) 40.7,-35.5 39.08,-37.12 v3(24.706,-37.12) 24.706,-31.848 27.011,-29.543 27.011,-22.883 29.065,-20.829 32.757,-20.829 43.815,-9.771 J2A.15@43.815,-7.544
NetJ2A_21: J2A.21 R2.2 | length 37.5
  Top Layer w1.143: v3(44.381,-38) 45.142,-38 46.512,-36.63 R2.2@46.512,-35.623
  Bottom Layer w1.143: v3(44.381,-38) 45.142,-38 47.775,-35.367 47.775,-13.289 51.435,-9.629 J2A.21@51.435,-7.544
NetJ2B_29: J2B.29 R10.2 R11.1 U4.1 | length 91.3
  Top Layer w1.016: R11.1 28.3,-28.9 ; U4.1@28.3,-25.25 28.3,-26.85 ; R10.2 28.3,-28.9 ; J2B.29@102.235,-7.544 102.235,-9.062 101.147,-10.15 45.4,-10.15 36.65,-18.9 36.65,-20.6 30.4,-26.85 28.3,-26.85 ; 28.3,-28.9 28.3,-26.85
NetJ2B_30: J2B.30 U1.1 U2.1 | length 127.6
  Top Layer w0.254: v3(20.2,-37.9) 20.2,-38.75 20.55,-39.1 U1.1
  Bottom Layer w0.254: 16,-17.85 16.95,-17.85 18.423,-16.377 U2.1
  Bottom Layer w1.016: v3(20.2,-37.9) 16,-33.7 16,-17.85 16,-9.4 23.1,-2.3 101.234,-2.3 102.235,-3.301 J2B.30@102.235,-5.004
NetJ3_1: J3.1 T3.6 | length 6.3
  Top Layer w0.762: J3.1@5.207,-39.9 8.02,-39.9 9.35,-38.57 T3.6@11,-38.57
NetJ4_1: J4.1 T4.2 | length 6
  Top Layer w0.254: 10.55,-15.641 10.559,-15.65 T4.2
  Top Layer w0.457: J4.1@5.2,-15.6 J4.1@5.241,-15.641
  Top Layer w0.611: J4.1@5.241,-15.641 10.55,-15.641
NetM1_1: M1.1 Z1.2 Z2.1 | length 9
  Top Layer w0.254: Z1.2@50.963,-83.867 Z1.2
  Top Layer w1.778: M1.1 46.915,-82.6 48.182,-83.867 50.471,-83.867
NetM2_1: M2.1 Z1.1 Z3.1 | length 9.7
  Top Layer w1.778: M2.1@46.815,-92.249 46.815,-87.674 48.082,-86.407 Z1.1@51.383,-86.407
NetM3_1: M3.1 T1.3 | length 5.8
  Top Layer w1.1: 13.798,-77.881 13.798,-74.972 M3.1@15.84,-72.93 ; M3.1@15.012,-75.496 M3.1@15.032,-75.496
NetM4_1: M4.1 T1.1 | length 5.3
  Top Layer w1.1: 13.914,-86.997 13.914,-90.291 M4.1 ; M4.1@14.968,-89.137 M4.1@15.027,-89.196
NetR1_1: R1.1 R3.2 U3.1 | length 25.5
  Top Layer w0.508: R3.2 35.465,-32.485 39.595,-28.355 U3.1
  Top Layer w1.143: R3.2 33.7,-33.45 32.925,-34.225 32.925,-36.425 34.5,-38 41.4,-38 42.77,-36.63 R1.1@42.77,-35.623
NetR1_2: R1.2 R2.1 U3.2 | length 11.1
  Top Layer w0.508: U3.2 40.865,-29.03 42.77,-30.935 R1.2
  Top Layer w1.143: R1.2 R2.1
NetR3_1: R3.1 R4.1 U4.3 | length 21.2
  Top Layer w0.508: U4.3 v3(30.15,-23.05)
  Top Layer w1.143: R3.1 v3(37.3,-35.45) R4.1
  Bottom Layer w1.143: v3(30.15,-23.05) 30.915,-23.05 34.15,-26.285 34.15,-28.7 37.3,-31.85 v3(37.3,-35.45)
NetR5_1: R5.1 R6.2 R10.1 U4.4 | length 28.1
  Top Layer w1.016: R5.1 26.25,-21.55 25.9,-21.9 U4.4 23.75,-23.05 22.45,-24.35 R6.2 20.9,-28.9 20.3,-29.5 20.3,-31.9 21.55,-33.15 28.85,-33.15 30.35,-31.65 R10.1
NetT2_4: T2.4 Z2.2 Z4.2 | length 0.4
  Top Layer w0.254: Z4.2 Z4.2@58.361,-83.867
NetT2_6: T2.6 Z3.2 Z4.1
pads on no net: J1A.3 J1A.4 J1A.5 J1A.6 J1A.7 J1A.8 J1A.9 J1A.10 J1A.11 J1A.12 J1A.13 J1A.14 J1A.15 J1A.16 J1A.17 J1A.18 J1A.19 J1A.20 J1A.21 J1A.22 J1A.23 J1A.24 J1A.25 J1A.26 J1A.27 J1A.28 J1A.29 J1A.30 J1A.31 J1A.32 J1B.1 J1B.2 J1B.3 J1B.4 J1B.5 J1B.6 J1B.7 J1B.8 J1B.9 J1B.10 J1B.13 J1B.14 J1B.15 J1B.16 J1B.17 J1B.18 J1B.19 J1B.20 J1B.21 J1B.22 J1B.23 J1B.24 J1B.25 J1B.26 J1B.27 J1B.28 J1B.29 J1B.30 J2A.4 J2A.5 J2A.6 J2A.7 J2A.8 J2A.9 J2A.10 J2A.11 J2A.12 J2A.13 J2A.14 J2A.16 J2A.17 J2A.18 J2A.19 J2A.20 J2A.22 J2A.23 J2A.24 J2A.25 J2A.26 J2A.27 J2A.28 J2A.29 J2A.30 J2A.31 J2A.32 J2B.1 J2B.2 J2B.3 J2B.4 J2B.5 J2B.6 J2B.7 J2B.8 J2B.9 J2B.10 J2B.11 J2B.12 J2B.13 J2B.14 J2B.15 J2B.16 J2B.17 J2B.18 J2B.19 J2B.20 J2B.21 J2B.22 J2B.23 J2B.24 J2B.25 J2B.26 J2B.27 J2B.28 M5.0 M6.0 M7.0 M8.0 M9.0 M10.0 T2.5 T4.5 U3.7

## Polygon pours and split planes (outlines as drawn)
GND on Top Layer "Top Layer-GND" (solid, pour order 36): 35.8,-64.8 11.15,-64.8 11.15,-100 35.8,-99.996
GND on Top Layer "Top Layer-NetJ2_2" (solid, pour order 30): 39.599,-70.562 39.599,-99.996 39.649,-99.946 67.35,-99.946 67.35,-70.543 63.25,-70.546
no net on Top Layer "Top Layer-No Net 1" (solid, pour order 20): 13.135,-83.935
no net on Top Layer "Top Layer-No Net 2" (solid, pour order 18): 13.135,-80.656
no net on Top Layer "Top Layer-No Net 3" (solid, pour order 16): 63.062,-83.382
no net on Top Layer "Top Layer-No Net 4" (solid, pour order 12): 64.129,-84.626
no net on Top Layer "Top Layer-No Net 5" (solid, pour order 10): 52.884,-85.264
no net on Top Layer "Top Layer-No Net 6" (solid, pour order 4): 50.598,-85.518
GND on Bottom Layer "Bottom Layer-GND" (solid, pour order 38): 0,-64.8 0,-100 35.8,-100 35.8,-64.8
GND on Bottom Layer "Bottom Layer-NetJ2_2" (solid, pour order 34): 39.599,-70.562 39.599,-99.996 77.023,-99.996 77.023,-70.562
GND on GND (split plane): 131.49,-99.49 0.51,-99.49 0.51,-0.51 131.49,-0.51
+3 on VCC (split plane): 131.49,-99.49 77.636,-99.49 77.636,-64.6 77.627,-64.502 77.598,-64.408 77.552,-64.321 77.541,-64.307 77.518,-64.264 77.455,-64.188 77.379,-64.126 77.292,-64.079 77.198,-64.051 77.1,-64.041 0.51,-64.041 0.51,-0.51 131.49,-0.51
GND on VCC (split plane): 76.632,-99.49 0.51,-99.49 0.51,-65.046 76.632,-65.046

## Other copper
Top Layer:
  rectangle net NetM4_1: 12.997,-89.631 14.653,-83.177
  rectangle net NetM3_1: 13.001,-81.405 14.652,-75.55
  rectangle net NetC7_2: 17,-41.85 17.8,-40.05
  rectangle net NetC8_2: 17,-39.65 17.8,-37.85
  region net NetC7_2: 17.25,-40.75 15.35,-40.75 15.35,-41.85 17.25,-41.85
  region net NetC8_2: 17.25,-37.85 15.35,-37.85 15.35,-38.95 17.25,-38.95
  rectangle: 9.72,-40.21 11.67,-39.47
  rectangle net GND: 12.06,-41.5 12.83,-38.19
  rectangle net NetC10_2: 15.4,-17.8 16.15,-15.832
  rectangle net NetC9_2: 15.4,-15.45 16.15,-13.482
  region net NetC10_2: 13.45,-16.3 12.942,-16.3 12.942,-17.8 13.45,-17.8
  region net NetC9_2: 13.45,-13.482 12.942,-13.482 12.942,-15.027 13.45,-15.027
  region net GND: 12.206,-14.8 11.901,-14.8 11.901,-16.477 12.206,-16.477
  region net GND: 12.206,-14.521 9.3,-14.521 9.3,-15.177 12.206,-15.177
  region net GND: 12.206,-16.121 9.3,-16.121 9.3,-16.756 12.206,-16.756
  region net GND: 12.78,-13.482 9.3,-13.482 9.3,-14.546 12.78,-14.546
  region net GND: 12.78,-16.731 9.3,-16.731 9.3,-17.8 12.78,-17.8
  region net GND: 15.127,-14.673 13.704,-14.673 13.704,-16.578 15.127,-16.578
  region net NetC9_2: 16.15,-13.482 13.049,-13.482 13.049,-14.394 16.15,-14.394
  region net NetC10_2: 16.15,-16.886 12.973,-16.886 12.973,-17.798 16.15,-17.798
  rectangle net NetT2_6: 58.414,-86.455 60.395,-85.518
  rectangle net NetT2_4: 58.642,-84.753 60.395,-83.61
  rectangle net NetT2_6: 58.795,-87.293 62.427,-86.381
  rectangle net NetT2_4: 58.718,-83.89 62.351,-82.978
  rectangle: 16.197,-82.656 18.147,-81.916
  rectangle net GND: 15.037,-83.946 15.807,-80.636
  rectangle net GND: 62.97,-83.596 76.7,-70.844
  rectangle net GND: 62.97,-99.713 76.7,-86.696
  rectangle net GND: 60.623,-86.074 62.046,-84.169
  rectangle net GND: 62.97,-87.496 70.5,-86.226
  rectangle net GND: 62.97,-84.042 70.5,-82.978
  rectangle net GND: 63.544,-86.252 70.5,-85.617
  rectangle net GND: 63.544,-84.652 70.5,-84.017
  rectangle net GND: 63.544,-85.972 63.849,-84.296
  rectangle net NetT2_4: 62.3,-84.477 62.808,-82.978
  rectangle net NetT2_6: 62.3,-87.296 62.808,-85.796
  rectangle net NetT2_6: 55.043,-87.296 58.853,-85.518
  rectangle net NetT2_4: 55.043,-84.756 58.853,-82.978
  rectangle net NetM1_1: 50.471,-84.756 54.281,-82.978
  rectangle net NetM2_1: 50.471,-87.296 54.281,-85.518
  region net GND: 0,-64.9 0.2,-64.7 12.8,-64.7 12.8,-100.1 12.6,-99.9 0,-99.9
  region net NetC7_2: 14.742,-41.489 14.889,-41.489 15.25,-41.85 15.65,-41.85 15.65,-41.05 15.35,-40.75 14.45,-40.75
  region net NetC8_2: 14.742,-38.211 14.889,-38.211 15.25,-37.85 15.65,-37.85 15.65,-38.65 15.35,-38.95 14.45,-38.95
  region net NetM4_1: 13.135,-83.935
  region: 13.127,-84.296
  region: 13.127,-80.296
  region: 13.135,-80.656
VCC (plane layer: these items are gaps in the copper):
  lines w1: 0,-64.544 77.1,-64.544 ; 77.134,-100.045 77.134,-64.6

## Silkscreen, mask and mechanical layers (free items; w line width, h text height)
Top Overlay:
  lines w0.508: 77.023,-70.562 77.023,-99.996 39.599,-99.996 39.599,-70.562 77.023,-70.562 ; 77.023,-70.562 77.023,-70.562 ; 0,-63.6 0,0 132.017,0 132.017,-63.551 0,-63.6 ; 0.054,-99.996 35.827,-99.996 35.827,-64.796 0.054,-64.796 0.054,-99.996
  text "CHEJ" at 1.9,-48.95 h1.52
  text "interface board" at 1.75,-51.45 h1.52
  text "V1.0" at 1.95,-54.534 h1.52
  text "CHEJ" at 20.307,-71.248 h1.52
  text "LPDA Balun" at 20.326,-74.318 h1.52
  text "CHEJ" at 61.228,-74.699 h1.52
  text "LOOP Balun" at 61.378,-78.076 h1.52
Mechanical 1:
  the board outline again, w0.508